# Altium PCB PCB.PcbDoc
Units mil, origin at the board's own origin, x right, y up, seen from the top; angles counter-clockwise.
Board outline 1968.5 x 2756.3 mil, 2 copper layers (Top Layer, Bottom Layer); 5 components, 0 nets, 64 pads, 0 vias.
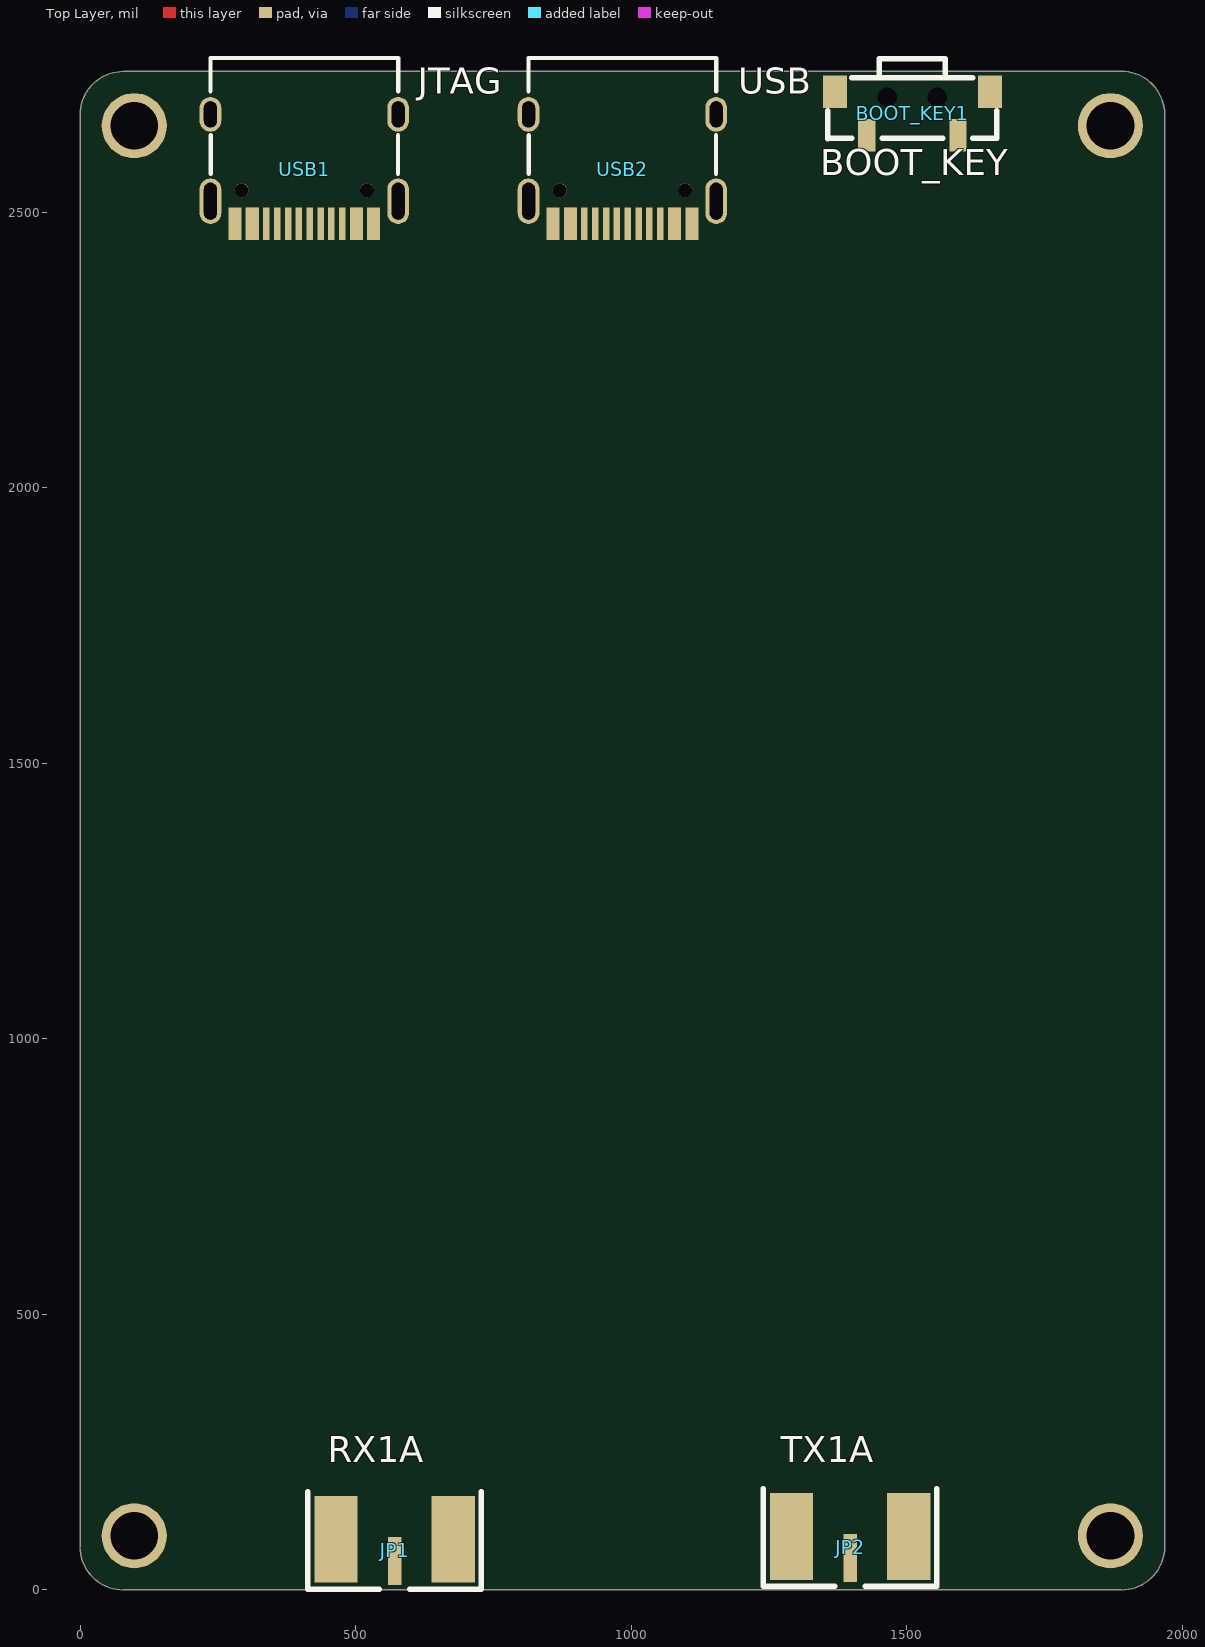
[diagram p0: Top Layer view]
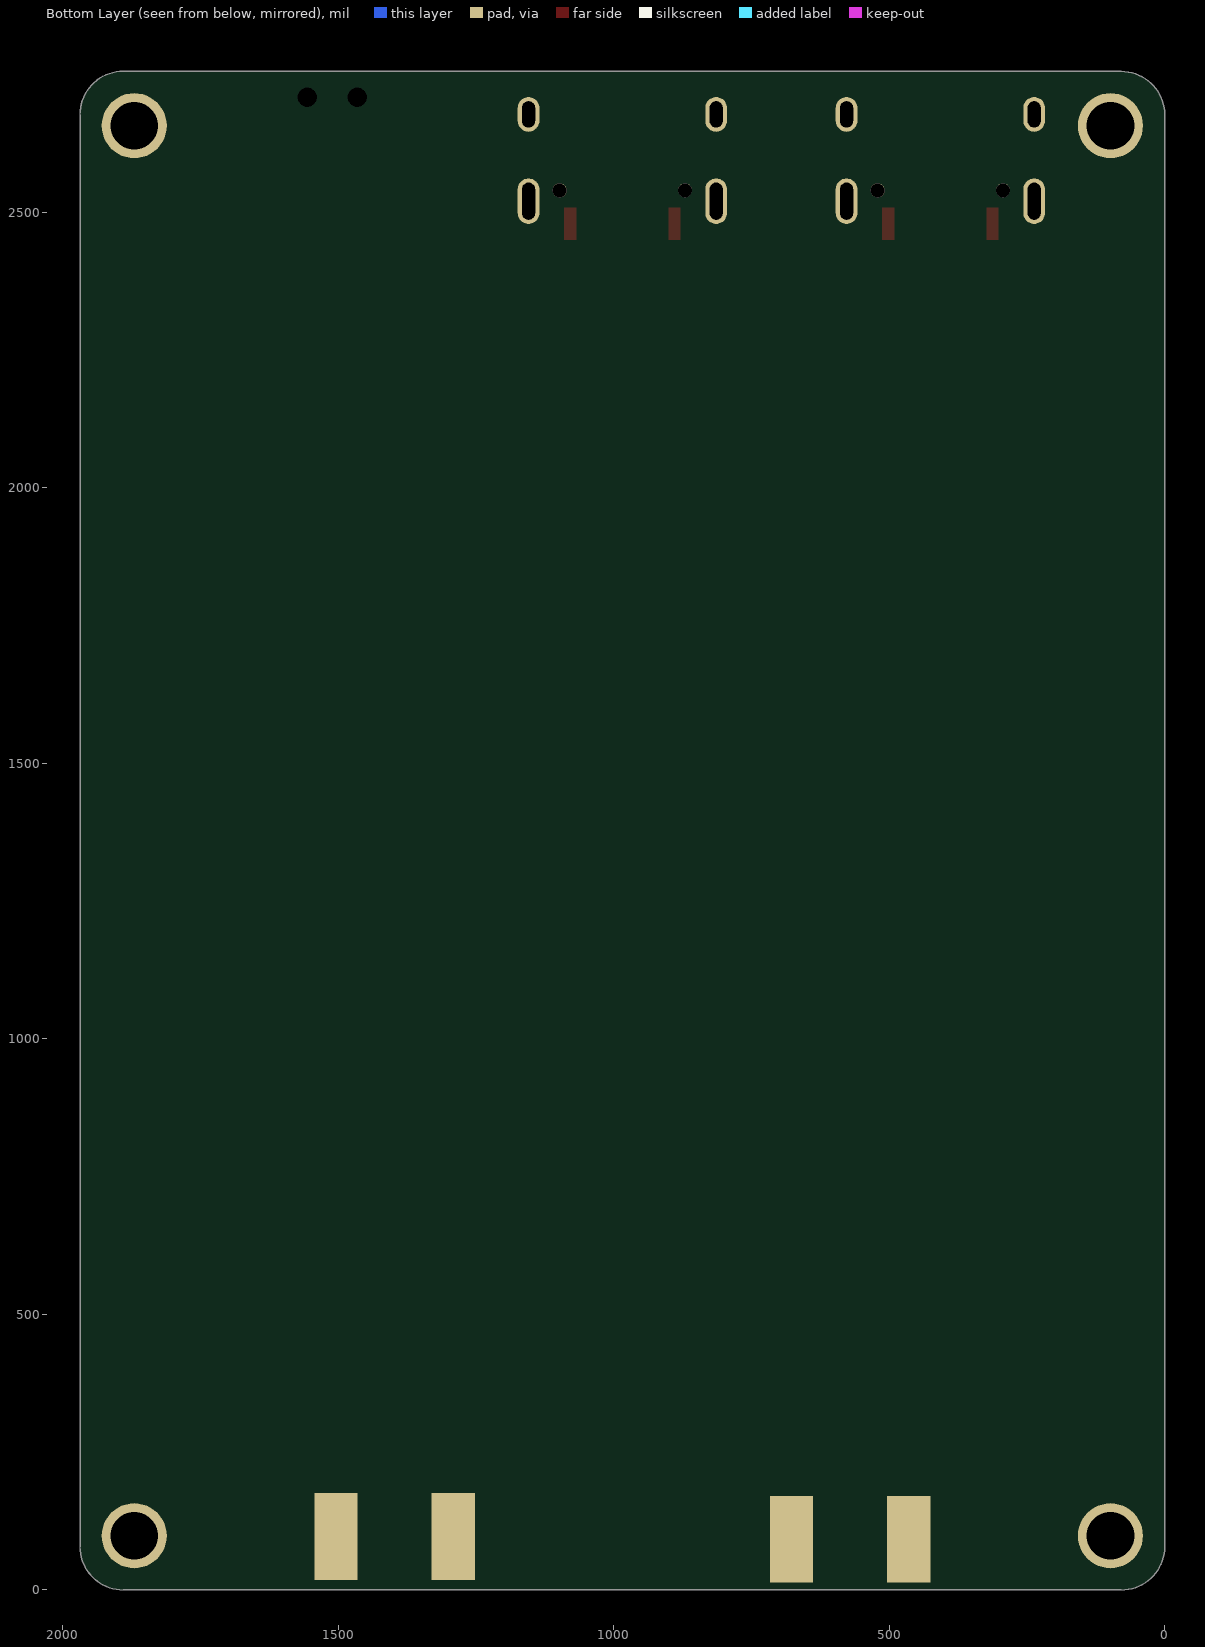
[diagram p1: Bottom Layer view, seen from below]

## Layer stack, top to bottom
Top Solder: solder mask 0.4, Solder Resist, Dk 3.5
Top Layer: signal copper 1.4
Dielectric 1: dielectric 12.6, FR-4, Dk 4.8
Bottom Layer: signal copper 1.4
Bottom Solder: solder mask 0.4, Solder Resist, Dk 3.5

## Board outline
0,78.74 0,2677.17 cw(c78.74,2677.17) 78.74,2755.91 78.74,2756.3 1889.76,2756.3 cw(c1889.76,2677.56) 1968.5,2677.56 1968.5,78.74 cw(c1889.76,78.74) 1889.76,0 78.74,0 cw(c78.74,78.74)

## Design rules (kind name [scope] priority, off if disabled: settings)
Clearance [All] p1: gap=4 ignorepadtopadclearanceinfootprint=TRUE
ComponentClearance [All] p1: gap=-100 collisioncheckmode=3 verticalgap=10 showdistances=FALSE
DiffPairsRouting [All] p1: maxlimit=10 minlimit=5 mostfreqgap=5 toplayer_minwidth=4 toplayer_maxwidth=100 toplayer_prefwidth=4.28 bottomlayer_minwidth=4 bottomlayer_maxwidth=100 bottomlayer_prefwidth=4.28 maxuncoupledlength=500
FanoutControl Fanout_BGA [IsBGA] p1: bgadir=Out bgaviamode=Closest fanoutstyle=UnderPads fanoutdirection=Alternating viagrid=1 // Fanout_BGA (Default Rule)
FanoutControl Fanout_LCC [IsLCC] p2: bgadir=Out bgaviamode=Centered fanoutstyle=UnderPads fanoutdirection=Alternating viagrid=1 // Fanout_LCC (Default Rule)
FanoutControl Fanout_SOIC [IsSOIC] p3: bgadir=Out bgaviamode=Centered fanoutstyle=UnderPads fanoutdirection=Alternating viagrid=1 // Fanout_SOIC (Default Rule)
FanoutControl Fanout_Small [(CompPinCount < 5)] p4: bgadir=Out bgaviamode=Centered fanoutstyle=UnderPads fanoutdirection=OutThenIn viagrid=1 // Fanout_Small (Default Rule)
FanoutControl Fanout_Default [All] p5: bgadir=Out bgaviamode=Centered fanoutstyle=UnderPads fanoutdirection=Alternating viagrid=1 // Fanout_Default (Default Rule)
HoleSize [All] p1: absolutevalues=TRUE maxlimit=200 minlimit=1 maxpercent=80.000 minpercent=20.000
HoleToHoleClearance [All] p1: gap=8 allowstackedmicrovias=TRUE
MatchedLengths DiffPair_RFMatchedLengthsRF [InDifferentialPairClass('RF_100_rx')] p1: tolerance=100 checknetsindiffpair=FALSE checkdiffpairvsdiffpair=TRUE checkxsignals=TRUE checkothers=TRUE
MinimumSolderMaskSliver [All] p1: minsoldermaskwidth=0
PolygonConnect [All] p1: connectstyle=Direct reliefconductorwidth=10 reliefentries=4 polygonreliefangle="90 Angle" airgapwidth=10
RoutingVias [All] p1: holewidth=11.81 width=18 viastyle="Through Hole" minholewidth=11.81 minwidth=15.75 maxholewidth=200 maxwidth=200
SilkToSilkClearance [All] p1: silktosilkclearance=0
SilkToSolderMaskClearance [IsPad] p1: minsilkscreentomaskgap=0 clearancetoexposedcopper=TRUE
SolderMaskExpansion [All] p1: expansion=4 istentingtop=FALSE
UnRoutedNet [All] p1: checkbadconnections=TRUE
Width [All] p1: maxlimit=100 minlimit=4 preferedwidth=4 minimp=50.000000 maximp=50.000000 favimp=50.000000
17 further rules are at their usual default settings.

## Classes and differential pairs
component class ZYNQ_PS_BANK: BOOT_KEY1
component class USB_PWR: USB1 USB2
component class AD936X_RF: JP1 JP2
differential pair TX1A_L: +TX1A_L_P -TX1A_L_N
differential pair RX1A_L: +RX1A_L_P -RX1A_L_N
differential pair DDR_DQS1: +DDR_DQS1_P -DDR_DQS1_N
differential pair DDR_DQS0: +DDR_DQS0_P -DDR_DQS0_N
differential pair DDR_CLK: +DDR_CLK_P -DDR_CLK_N
differential pair USB: +USB_P -USB_N
differential pair JTAG_USB: +JTAG_USB_P -JTAG_USB_N
differential pair TX_FRAME: +TX_FRAME_P -TX_FRAME_N
differential pair TX_D5: +TX_D5_P -TX_D5_N
differential pair TX_D4: +TX_D4_P -TX_D4_N
differential pair TX_D3: +TX_D3_P -TX_D3_N
differential pair TX_D2: +TX_D2_P -TX_D2_N
differential pair TX_D1: +TX_D1_P -TX_D1_N
differential pair TX_D0: +TX_D0_P -TX_D0_N
differential pair TX1A: +TX1A_P -TX1A_N
differential pair RX_FRAME: +RX_FRAME_P -RX_FRAME_N
differential pair RX_D5: +RX_D5_P -RX_D5_N
differential pair RX_D4: +RX_D4_P -RX_D4_N
differential pair RX_D3: +RX_D3_P -RX_D3_N
differential pair RX_D2: +RX_D2_P -RX_D2_N
differential pair RX_D1: +RX_D1_P -RX_D1_N
differential pair RX_D0: +RX_D0_P -RX_D0_N
differential pair RX1A: +RX1A_P -RX1A_N
differential pair FB_CLK: +FB_CLK_P -FB_CLK_N
differential pair DATA_CLK: +DATA_CLK_P -DATA_CLK_N

## Components (designator, comment, footprint, x,y, rotation, side; value= is the part's Value field where it differs from the comment)
BOOT_KEY1 "按键" "TSW 3*6*4.3-S-W" 1510.63,2709.31 r180 top
JP1 "SMA" "SMA-KE - 0.5mm" 570.87,92.13 r180 top
JP2 "SMA" "SMA-KE - 0.5mm" 1397.64,97.24 r180 top
USB1 "Type-C" TYPE-C-16P 407.09,2578.74 r90 top
USB2 "Type-C" TYPE-C-16P 984.25,2578.74 r90 top

## Footprints (in the part's own frame and the unit in brackets; to place one, negate y for a bottom-side part, rotate by r counter-clockwise, add the part's x,y. Pads: shape width x height; smd on the part's side, far side on the other; paste and mask are expansions set on the pad)
"SMA-KE - 0.5mm" [mm] "SMA 偏脚射频天线座"
  rect 0.62x2.2 smd: 1(0,1)
  rect 2x4 smd: 2(-2.7,0) 2(2.7,0)
  rect 2x4 smd far side: 2(-2.7,0) 2(2.7,0)
  silkscreen extent -4,-2.2 4,2.3, body extent -3.25,-1.3 3.25,12.2, height 3.75
"TSW 3*6*4.3-S-W" [mm] "侧立贴片3*6*4.3"
  rect 1.1x1.5 smd: 0(-3.575,-0.25) 0(3.575,-0.25)
  round 0 hole 0.9: 0(-1.15,0) 0(1.15,0)
  rect 0.8x1.5 smd: 1(2.1,1.75) 2(-2.1,1.75)
  silkscreen extent -3.9,-1.78 3.9,1.91, body extent -3.9,-1.79 3.9,1.91, height 3.51
TYPE-C-16P [mm]
  round 0.65 hole 0.65: 0(-0.98,2.89) 0(-0.98,-2.89)
  oval 1.6x1 hole 0.6 slot 1.2 at 0 deg: 1(2.52,4.325) 2(2.52,-4.325)
  oval 2.1x1 hole 0.6 slot 1.7 at 0 deg: 3(-1.48,-4.325) 4(-1.48,4.325)
  rect 1.5x0.3 smd: A1(-2.52,-3.35) A4(-2.52,-2.55) A5(-2.52,-1.25) A6(-2.52,-0.25) A7(-2.52,0.25) A8(-2.52,1.25) A9(-2.52,2.55) A12(-2.52,3.35) B1(-2.52,3.05) B4(-2.52,2.25) B5(-2.52,1.75) B6(-2.52,0.75) B7(-2.52,-0.75) B8(-2.52,-1.75) B9(-2.52,-2.25) B12(-2.52,-3.05)
  silkscreen extent -0.22,-4.33 5.12,4.33, body extent -2.54,-4.46 5.21,4.49, height 3.36

## Part data
BOOT_KEY1: "常用"
JP1 JP2: "SMA-2.4G射频天线接口", BOM名称=SMA-2.4G射频天线接口, 学习资源=www.ooocke.com, 版权归属=源创客
USB1: library part Type-C-16P, "带通信"

## Free pads (board coordinates)
  round 118.11 hole 86.61: 4(98.43,98.43) 4(98.43,2657.48) 4(1870.08,98.43) 4(1870.08,2657.48)

## Nets (pads, with @x,y where several pads share a name; then routed paths per layer and width w, separated by ;. In a path a pad name is that pad's centre, name@x,y a point inside that pad or via, vN(x,y) a via of type N, cw(c..) or ccw(c..) an arc to the next point about the centre after c; other vN are vias at no path point)
pads on no net: BOOT_KEY1.0 BOOT_KEY1.1 BOOT_KEY1.2 JP1.1 JP1.2 JP2.1 JP2.2 USB1.0 USB1.1 USB1.2 USB1.3 USB1.4 USB1.A1 USB1.A4 USB1.A5 USB1.A6 USB1.A7 USB1.A8 USB1.A9 USB1.A12 USB1.B1 USB1.B4 USB1.B5 USB1.B6 USB1.B7 USB1.B8 USB1.B9 USB1.B12 USB2.0 USB2.1 USB2.2 USB2.3 USB2.4 USB2.A1 USB2.A4 USB2.A5 USB2.A6 USB2.A7 USB2.A8 USB2.A9 USB2.A12 USB2.B1 USB2.B4 USB2.B5 USB2.B6 USB2.B7 USB2.B8 USB2.B9 USB2.B12

## Other copper
Top Layer:
  rectangle: 301.18,2450.39 323.62,2509.45
  rectangle: 490.16,2450.39 512.6,2509.45
  rectangle: 1067.32,2450.39 1089.76,2509.45
  rectangle: 878.35,2450.39 900.79,2509.45

## Silkscreen, mask and mechanical layers (free items; w line width, h text height)
Top Overlay:
  text "JTAG" at 612.76,2700.43 h80
  text "USB" at 1194.25,2700.43 h80
  text "BOOT_KEY" at 1343.46,2552.54 h80
  text "RX1A" at 449.8,216.14 h80
  text "TX1A" at 1271.85,216.14 h80